# Altium PCB Flow_Pump显示板_V2.0.PcbDoc
Units mil, origin at the board's own origin, x right, y up, seen from the top; angles counter-clockwise.
Board outline 3740.47 x 3740.47 mil, 2 copper layers (Top Layer, Bottom Layer); 36 components, 33 nets, 119 pads, 1248 vias.
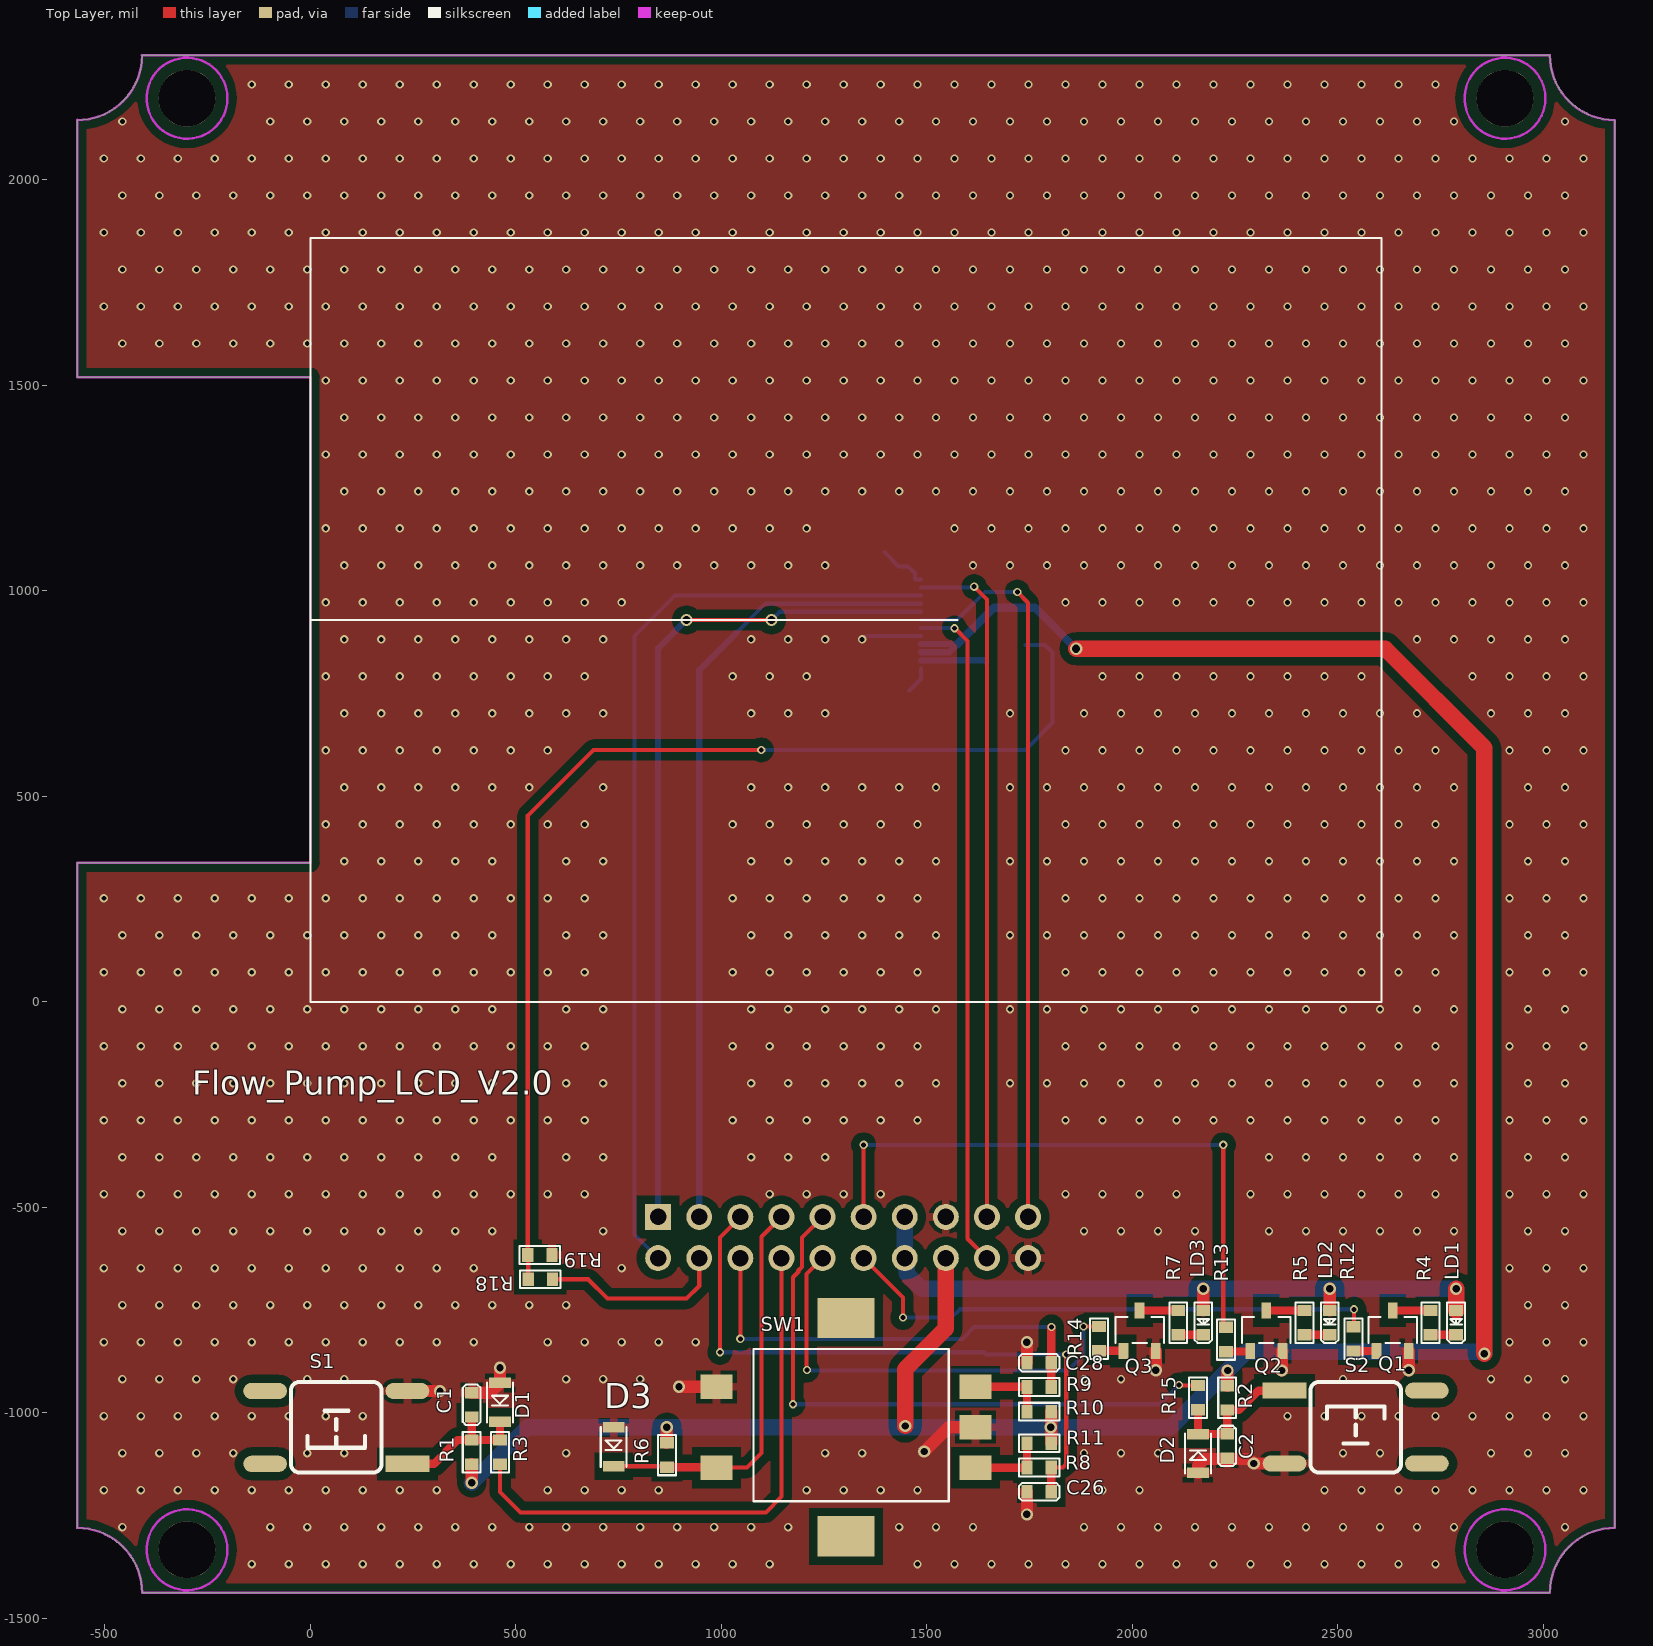
[diagram p0: Top Layer view]
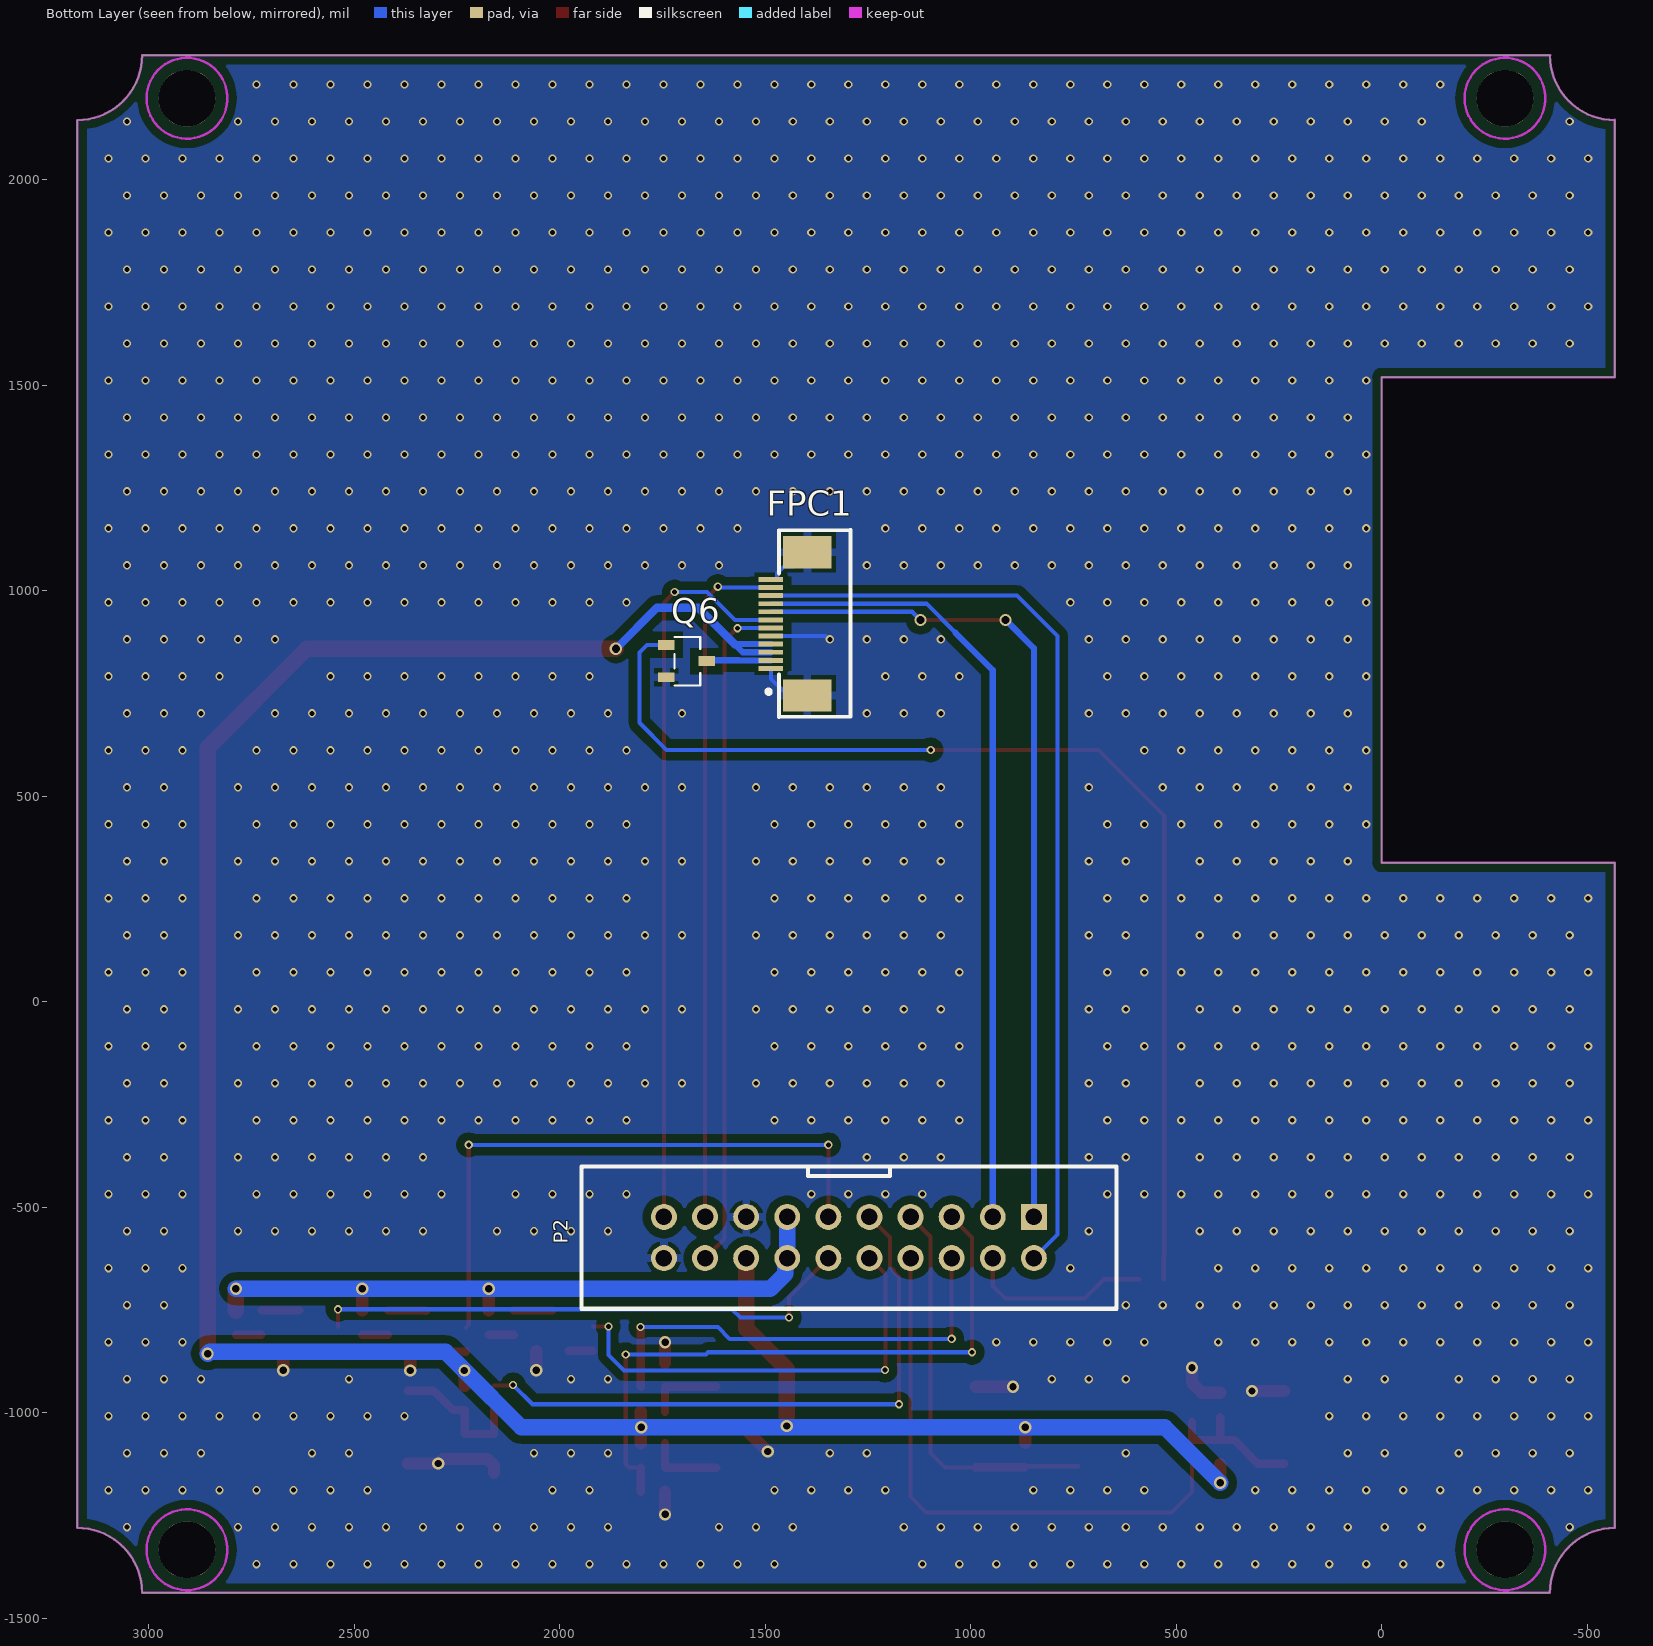
[diagram p1: Bottom Layer view, seen from below]

## Layer stack, top to bottom
Top Solder: solder mask 0.4, Solder Resist, Dk 3.5
Top Layer: signal copper 1.4
Dielectric 1: dielectric 12.6, FR-4, Dk 4.8
Bottom Layer: signal copper 1.4
Bottom Solder: solder mask 0.4, Solder Resist, Dk 3.5

## Board outline
-566.93,-1279.92 -566.93,338.58 0,338.58 0,1519.69 -567.09,1519.69 -567.09,1521.86 -567.09,2145.12 ccw(c-567.09,2302.6) -409.61,2302.6 -409.93,2302.76 3015.75,2302.76 3015.59,2302.91 ccw(c3173.07,2302.91) 3173.07,2145.43 3173.07,-1279.76 3173.39,-1279.76 ccw(c3173.39,-1437.24) 3015.91,-1437.24 3015.91,-1437.4 -409.29,-1437.4 -409.29,-1437.56 ccw(c-566.77,-1437.56)

## Design rules (kind name [scope] priority, off if disabled: settings)
Clearance Clearance_1 [InPolygon] p1: gap=20 ignorepadtopadclearanceinfootprint=FALSE
Clearance [All] p2: gap=5 ignorepadtopadclearanceinfootprint=FALSE
HoleSize [All] p1: absolutevalues=TRUE maxlimit=200 minlimit=1 maxpercent=80.000 minpercent=20.000
PolygonConnect PolygonConnect_1 [IsVia] p1: connectstyle=Direct reliefconductorwidth=10 reliefentries=4 polygonreliefangle="90 Angle" airgapwidth=10
PolygonConnect [All] p2: connectstyle=Relief reliefconductorwidth=20 reliefentries=4 polygonreliefangle="90 Angle" airgapwidth=10
RoutingVias [All] p1: holewidth=28 width=50 viastyle="Through Hole" minholewidth=28 minwidth=50 maxholewidth=28 maxwidth=50
SolderMaskExpansion [All] p1: expansion=4 istentingtop=FALSE
Width [All] p1: maxlimit=150 minlimit=10 preferedwidth=10
29 further rules are at their usual default settings.

## Components (designator, comment, footprint, x,y, rotation, side; value= is the part's Value field where it differs from the comment)
C1 "1uF/25V" 0603C 392.44,-951.03 r270 top value=0.1u/50V
C2 "1uF/25V" 0603C 2230.44,-1110.09 r90 top value=0.1u/50V
C26 "10nF" 0603C 1743.39,-1192.03 r0 top
C28 "10nF" 0603C 1802.44,-878.03 r180 top
D1 "CESDB5V0D3" SOD323 461.44,-927.03 r270 top
D2 "CESDB5V0D3" SOD323 2159.44,-1146.03 r90 top
D3 "CESDB5V0D3" SOD323 738,-1035.51 r270 top
FPC1 "AFC07-S12FCA-00" FPC-SMD_12P-P0.50_AFC07-S12FCA-00 1441.49,919.6 r90 bottom locked
LD1 "LED_Green_19-217" 0603LED 2787.44,-751.03 r270 top value=19-217/G7C-AN1P2/3T
LD2 "LED_Green_19-217" 0603LED 2479.94,-751.03 r270 top value=19-217/G7C-AN1P2/3T
LD3 "LED_Green_19-217" 0603LED 2172.44,-751.03 r270 top value=19-217/G7C-AN1P2/3T
P2 "BH254V-20P" DC-2.54-L-Z-20P 1296.07,-573.4 r0 bottom
Q1 "MMBT3904" SOT23-3 2593.7,-849.46 r270 top
Q2 "MMBT3904" SOT23-3 2286.44,-849.46 r270 top
Q3 "MMBT3904" SOT23-3 1978.07,-849.46 r270 top
Q6 "MMBT3904" SOT23-3 1740.43,868.37 r0 bottom
R1 "10K" 0603R 392.44,-1125.09 r90 top
R2 "10K" 0603R 2230.44,-934.03 r270 top
R3 "100" 0603R 461.44,-1125.09 r90 top
R4 "1K" 0603R 2725.44,-810.09 r90 top
R5 "1K" 0603R 2418.44,-810.09 r90 top
R6 "4.7K" 0603R 867.44,-1073.03 r270 top
R7 "1K" 0603R 2111.44,-810.09 r90 top
R8 "10K" 0603R 1802.44,-1133.03 r180 top
R9 "10K" 0603R 1802.44,-937.03 r180 top
R10 "10K" 0603R 1743.39,-997.03 r0 top
R11 "10K" 0603R 1743.39,-1074.03 r0 top
R12 "1K" 0603R 2537.87,-790.4 r270 top
R13 "1K" 0603R 2227.44,-792.03 r270 top
R14 "1K" 0603R 1918.44,-790.03 r270 top
R15 "100" 0603R 2159.44,-933.49 r270 top
R18 "1K" 0603R 589.06,-675 r180 top
R19 "10K" 0603R 528.94,-616 r0 top
S1 "SW-PB" "TSW SMD-6*6*8" 62.99,-1034.96 r180 top locked
S2 "SW-PB" "TSW SMD-6*6*8" 2543.31,-1034.96 r0 top locked
SW1 "RE1103" EX1103S-D2-10 1303.15,-1034.96 r90 top locked

## Footprints (in the part's own frame and the unit in brackets; to place one, negate y for a bottom-side part, rotate by r counter-clockwise, add the part's x,y. Pads: shape width x height; smd on the part's side, far side on the other; paste and mask are expansions set on the pad)
0603C [mm]
  rect 0.7x0.85 smd: 1(0,0) 2(1.5,0)
  silkscreen extent -0.5,-0.55 2,0.55
0603LED [mm]
  rect 0.7x0.85 smd: 1(0,0) 2(1.5,0)
  silkscreen extent -0.5,-0.55 2,0.55
0603R [mm]
  rect 0.7x0.85 smd: 1(0,0) 2(1.5,0)
  silkscreen extent -0.5,-0.55 2,0.55
DC-2.54-L-Z-20P [mm] "立式直插简牛插座，间距2.54"
  rect 1.6x1.6 hole 1.02: 1(-11.43,-1.27)
  round 1.6 hole 1.02: 2(-11.43,1.27) 3(-8.89,-1.27) 4(-8.89,1.27) 5(-6.35,-1.27) 6(-6.35,1.27) 7(-3.81,-1.27) 8(-3.81,1.27) 9(-1.27,-1.27) 10(-1.27,1.27) 11(1.27,-1.27) 12(1.27,1.27) 13(3.81,-1.27) 14(3.81,1.27) 15(6.35,-1.27) 16(6.35,1.27) 17(8.89,-1.27) 18(8.89,1.27) 19(11.43,-1.27) 20(11.43,1.27)
  silkscreen extent -16.53,-4.4 16.53,4.4, body extent -16.53,-4.4 16.52,4.7, height 8.8
EX1103S-D2-10 [mm]
  rect 1.5x2 smd: A(-2.5,-8) B(2.5,-8) C(0,-8) D(-2.5,8) E(2.5,8)
  rect 2.5x3.5 smd: A3(6.75,0) A4(-6.75,0)
  silkscreen extent -4.57,-6.35 4.83,5.71
FPC-SMD_12P-P0.50_AFC07-S12FCA-00 [mm]
  rect 0.3x1.5 smd paste+0.051: 1(-2.754,1.13) 2(-2.254,1.13) 3(-1.755,1.13) 4(-1.254,1.13) 5(-0.755,1.13) 6(-0.254,1.13) 7(0.245,1.13) 8(0.746,1.13) 9(1.245,1.13) 10(1.746,1.13) 11(2.245,1.13) 12(2.746,1.13)
  rect 2x3 smd paste+0.051: 13(4.43,-1.13) 14(-4.43,-1.124)
  silkscreen extent -5.76,-3.8 5.8,1.4
SOD323 [mm]
  rect 0.65x1.35 smd: 1(0,0) 2(2.4,0)
  silkscreen extent -0.03,-0.8 2.44,0.8
SOT23-3 [mm]
  rect 1x0.6 smd: 1(0,0) 2(0,2) 3(-2.5,1)
  silkscreen extent -2.1,-0.5 -0.5,2.5
"TSW SMD-6*6*8" [mm] "6*6*8mm"
  rect 2.7x1 smd: 1(-4.4,2.261)
  oval 2.7x1 smd: 2(-4.4,-2.239) 3(4.4,-2.239) 4(4.4,2.261)
  silkscreen extent -2.79,-2.79 2.79,2.79, body extent -4.5,-3 4.5,3, height 7.95

## Part data
C1 C2: library part CAP
C26 C28: library part CAP, "Capacitor"
D1 D2 D3: library part "DIODE S"
P2: library part "Header 10X2", "Header, 10-Pin, Dual row", LatestRevisionDate=17-Jul-2002, LatestRevisionNote="Re-released for DXP Platform.", Publisher="Altium Limited"
Q1 Q2 Q3 Q6: library part NPN_MMBT3904
R1 R2 R3 R4 R5 R7 R12 R13 R14 R15 R18 R19: library part RES0603, ID=233, 制造商=三星/YAGEO, 参数值=1.00E+04, 器件等级=——, 工作温度="–55°C to 155°C", 序号=109, 物料主编码(PN)=150000040, 物料名称=贴片电阻, 物料描述=RES,贴片电阻,0603,10k,±1%,1/10W,1.6X0.8X0.45mm,RC1608F103CS/RC0603FR-0710KL, 物料类型=表贴电阻, 精度=±1%, 规格型号(完整型号)=RC1608F103CS/RC0603FR-0710KL
R6 R8 R9 R10 R11: library part RES2
S1 S2: "Switch", LatestRevisionDate=17-Jul-2002, LatestRevisionNote="Re-released for DXP Platform.", PackageReference=SPST-2, Published=24-Mar-1999, Publisher="Altium Limited"
FPC1: Symbol=AFC07-S12FCA-00
LD1 LD2 LD3: ID=6, 制造商=Everlight, 器件等级=——, 工作温度="–40°C to 85°C", 序号=33, 物料主编码(PN)=100000032, 物料名称=绿色LED, 物料描述=Other,LED,绿色,0603,1.6X0.8X0.4mm,19-217/G7C-AN1P2/3T, 物料类型=特殊二极管, 规格型号(完整型号)=19-217/G7C-AN1P2/3T

## Free pads (board coordinates)
  round 137.8 hole 137.8 unplated: 0(-300.14,-1332.99) 0(-300.14,2198.35) 0(2906.44,-1332.99) 0(2906.44,2198.35)

## Via types
v1: diameter 20, hole 12, Top Layer to Bottom Layer, tented both sides, 1226 vias
v2: diameter 30, hole 18, Top Layer to Bottom Layer, tented both sides, 19 vias
v3: diameter 30, hole 20, Top Layer to Bottom Layer, tented both sides, 3 vias

## Nets (pads, with @x,y where several pads share a name; then routed paths per layer and width w, separated by ;. In a path a pad name is that pad's centre, name@x,y a point inside that pad or via, vN(x,y) a via of type N, cw(c..) or ccw(c..) an arc to the next point about the centre after c; other vN are vias at no path point)
3.3V_ISO: FPC1.3 FPC1.4 P2.16 R1.1 R2.1 R6.1 R10.2 R11.2 | length 6363.8
  Top Layer w30: v2(392.44,-1170.03) R1.1 ; R6.1 v2(867.44,-1035.03) ; R11.2 R10.2 ; R2.1 2230.44,-898.03 v2(2231.44,-897.03)
  Top Layer w40: v2(1447,-1032) 1447,-894 1546.07,-794.93 P2.16 ; v3(1863,859) 2615,859 2856.44,617.56 v2(2856.44,-856.03)
  Bottom Layer w15: FPC1.3 1554.52,850.52 1574.21,870.21 FPC1.4
  Bottom Layer w20: 1574.21,870.21 1663,959 1763,959 v3(1863,859)
  Bottom Layer w40: v2(392.44,-1170.03) 527.44,-1035.03 v2(867.44,-1035.03) v2(1801.44,-1035.03) 2093.44,-1035.03 v2(2231.44,-897.03) 2277.44,-851.03 2851.44,-851.03 v2(2856.44,-856.03)
BL: P2.4 R18.1 | length 456.9
  Top Layer w10: R18.1 676,-675 723,-722 915,-722 946.07,-690.93 P2.4
CS: FPC1.8 P2.1 | length 2060.2
  Top Layer w10: v3(915,929) v3(1122,929)
  Bottom Layer w10: v3(1122,929) 1141.95,948.95 FPC1.8
  Bottom Layer w15: P2.1 846.07,860.07 v3(915,929)
DC: FPC1.7 P2.19 | length 1793.3
  Top Layer w10: v1(1720,997) 1746.07,970.93 P2.19
  Bottom Layer w10: FPC1.7 1573.26,929.26 1641,997 v1(1720,997)
FAULT: P2.12 R12.1 | length 1333
  Top Layer w10: P2.12 1441.74,-719.07 v1(1441.74,-768.26) ; R12.1 2539,-789.27 v1(2539,-748)
  Bottom Layer w10: v1(1441.74,-768.26) 1559.74,-768.26 1580,-748 v1(2539,-748)
GND: C1.1 C2.1 C26.1 C28.2 D1.1 D2.1 D3.1 FPC1.1 FPC1.5 FPC1.12 FPC1.13 FPC1.14 P2.15 P2.20 Q1.2 Q2.2 Q3.2 Q6.2 R19.2 S1.2 S2.2 SW1.C SW1.E | length 1258.9
  Top Layer w30: S1.2 v2(315.44,-946.79) ; C1.1 437.44,-951.03 D1.1 v2(461.44,-890.03) ; v2(896.94,-936.54) SW1.E ; v2(1493.44,-1094.03) 1552.51,-1034.96 SW1.C ; v2(1743.39,-1247.09) C26.1 ; C28.2 v2(1743.39,-827.98) ; v2(2056.81,-896.66) Q3.2 ; D2.1 2159.44,-1128.03 2175.44,-1112.03 2284.39,-1112.03 v2(2295.48,-1123.13) S2.2 ; v2(2363.44,-897.03) 2363.44,-851.2 Q2.2@2364.18,-850.46 ; v2(2672.44,-896.03) Q1.2
  Bottom Layer w10: v1(1342.44,881.97) 1345.15,881.97 1353.07,889.89 FPC1.5 ; FPC1.13 1431.37,1059.63 1454.04,1059.63 1470.93,1042.74 1470.93,1028.6 1471.84,1027.69 FPC1.12 ; 1457,757 1485.98,785.98 FPC1.1
  other v1: -142.56,-1368.03 -52.56,-1368.03 37.44,-1368.03 127.44,-1368.03 217.44,-1368.03 307.44,-1368.03 397.44,-1368.03 487.44,-1368.03 577.44,-1368.03 667.44,-1368.03 757.44,-1368.03 847.44,-1368.03 937.44,-1368.03 1027.44,-1368.03 1117.44,-1368.03 1477.44,-1368.03 1567.44,-1368.03 1657.44,-1368.03 1747.44,-1368.03 1837.44,-1368.03 1927.44,-1368.03 2017.44,-1368.03 2107.44,-1368.03 2197.44,-1368.03 2287.44,-1368.03 2377.44,-1368.03 2467.44,-1368.03 2557.44,-1368.03 2647.44,-1368.03 2737.44,-1368.03 -457.56,-1278.03 -97.56,-1278.03 -7.56,-1278.03 82.44,-1278.03 172.44,-1278.03 262.44,-1278.03 352.44,-1278.03 442.44,-1278.03 532.44,-1278.03 622.44,-1278.03 712.44,-1278.03 802.44,-1278.03 892.44,-1278.03 982.44,-1278.03 1072.44,-1278.03 1162.44,-1278.03 1432.44,-1278.03 1522.44,-1278.03 1612.44,-1278.03 1882.44,-1278.03 1972.44,-1278.03 2062.44,-1278.03 2152.44,-1278.03 2242.44,-1278.03 2332.44,-1278.03 2422.44,-1278.03 2512.44,-1278.03 2602.44,-1278.03 2692.44,-1278.03 2782.44,-1278.03 3052.44,-1278.03 -502.56,-1188.03 -412.56,-1188.03 -322.56,-1188.03 -232.56,-1188.03 -142.56,-1188.03 -52.56,-1188.03 37.44,-1188.03 127.44,-1188.03 217.44,-1188.03 307.44,-1188.03 577.44,-1188.03 667.44,-1188.03 757.44,-1188.03 847.44,-1188.03 1207.44,-1188.03 1297.44,-1188.03 1387.44,-1188.03 1477.44,-1188.03 1927.44,-1188.03 2017.44,-1188.03 2467.44,-1188.03 2557.44,-1188.03 2647.44,-1188.03 2737.44,-1188.03 2827.44,-1188.03 2917.44,-1188.03 3007.44,-1188.03 3097.44,-1188.03 -457.56,-1098.03 -367.56,-1098.03 -277.56,-1098.03 -187.56,-1098.03 -7.56,-1098.03 82.44,-1098.03 622.44,-1098.03 1252.44,-1098.03 1342.44,-1098.03 1882.44,-1098.03 1972.44,-1098.03 2062.44,-1098.03 2512.44,-1098.03 2602.44,-1098.03 2872.44,-1098.03 2962.44,-1098.03 3052.44,-1098.03 -502.56,-1008.03 -412.56,-1008.03 -322.56,-1008.03 -232.56,-1008.03 -142.56,-1008.03 -52.56,-1008.03 37.44,-1008.03 127.44,-1008.03 2377.44,-1008.03 2467.44,-1008.03 2557.44,-1008.03 2647.44,-1008.03 2737.44,-1008.03 2827.44,-1008.03 2917.44,-1008.03 3007.44,-1008.03 3097.44,-1008.03 -457.56,-918.03 -367.56,-918.03 -277.56,-918.03 -187.56,-918.03 -7.56,-918.03 82.44,-918.03 622.44,-918.03 712.44,-918.03 802.44,-918.03 1882.44,-918.03 1972.44,-918.03 2512.44,-918.03 2872.44,-918.03 2962.44,-918.03 3052.44,-918.03 -502.56,-828.03 -412.56,-828.03 -322.56,-828.03 -232.56,-828.03 -142.56,-828.03 -52.56,-828.03 37.44,-828.03 127.44,-828.03 217.44,-828.03 307.44,-828.03 397.44,-828.03 577.44,-828.03 667.44,-828.03 757.44,-828.03 847.44,-828.03 937.44,-828.03 2917.44,-828.03 3007.44,-828.03 3097.44,-828.03 -457.56,-738.03 -367.56,-738.03 -277.56,-738.03 -187.56,-738.03 -97.56,-738.03 -7.56,-738.03 82.44,-738.03 172.44,-738.03 262.44,-738.03 352.44,-738.03 442.44,-738.03 532.44,-738.03 622.44,-738.03 2962.44,-738.03 3052.44,-738.03 -502.56,-648.03 -412.56,-648.03 -322.56,-648.03 -232.56,-648.03 -142.56,-648.03 -52.56,-648.03 37.44,-648.03 127.44,-648.03 217.44,-648.03 307.44,-648.03 397.44,-648.03 757.44,-648.03 2917.44,-648.03 3007.44,-648.03 3097.44,-648.03 -457.56,-558.03 -367.56,-558.03 -277.56,-558.03 -187.56,-558.03 -97.56,-558.03 -7.56,-558.03 82.44,-558.03 172.44,-558.03 262.44,-558.03 352.44,-558.03 442.44,-558.03 712.44,-558.03 1882.44,-558.03 1972.44,-558.03 2062.44,-558.03 2152.44,-558.03 2332.44,-558.03 2422.44,-558.03 2512.44,-558.03 2602.44,-558.03 2692.44,-558.03 2782.44,-558.03 2962.44,-558.03 3052.44,-558.03 -502.56,-468.03 -412.56,-468.03 -322.56,-468.03 -232.56,-468.03 -142.56,-468.03 -52.56,-468.03 37.44,-468.03 127.44,-468.03 217.44,-468.03 307.44,-468.03 397.44,-468.03 487.44,-468.03 577.44,-468.03 667.44,-468.03 1117.44,-468.03 1207.44,-468.03 1297.44,-468.03 1387.44,-468.03 1837.44,-468.03 1927.44,-468.03 2017.44,-468.03 2107.44,-468.03 2287.44,-468.03 2377.44,-468.03 2467.44,-468.03 2557.44,-468.03 2647.44,-468.03 2737.44,-468.03 2917.44,-468.03 3007.44,-468.03 3097.44,-468.03 -457.56,-378.03 -367.56,-378.03 -277.56,-378.03 -187.56,-378.03 -97.56,-378.03 -7.56,-378.03 82.44,-378.03 172.44,-378.03 262.44,-378.03 352.44,-378.03 442.44,-378.03 622.44,-378.03 712.44,-378.03 1072.44,-378.03 1162.44,-378.03 1252.44,-378.03 2332.44,-378.03 2422.44,-378.03 2512.44,-378.03 2602.44,-378.03 2692.44,-378.03 2782.44,-378.03 2962.44,-378.03 3052.44,-378.03 -502.56,-288.03 -412.56,-288.03 -322.56,-288.03 -232.56,-288.03 -142.56,-288.03 -52.56,-288.03 37.44,-288.03 127.44,-288.03 217.44,-288.03 307.44,-288.03 397.44,-288.03 487.44,-288.03 577.44,-288.03 667.44,-288.03 1027.44,-288.03 1117.44,-288.03 1207.44,-288.03 1297.44,-288.03 1387.44,-288.03 1477.44,-288.03 1837.44,-288.03 1927.44,-288.03 2017.44,-288.03 2107.44,-288.03 2197.44,-288.03 2287.44,-288.03 2377.44,-288.03 2467.44,-288.03 2557.44,-288.03 2647.44,-288.03 2737.44,-288.03 2917.44,-288.03 3007.44,-288.03 3097.44,-288.03 -457.56,-198.03 -367.56,-198.03 -277.56,-198.03 -187.56,-198.03 -97.56,-198.03 -7.56,-198.03 82.44,-198.03 172.44,-198.03 262.44,-198.03 352.44,-198.03 442.44,-198.03 622.44,-198.03 712.44,-198.03 1072.44,-198.03 1162.44,-198.03 1252.44,-198.03 1342.44,-198.03 1432.44,-198.03 1522.44,-198.03 1702.44,-198.03 1792.44,-198.03 1882.44,-198.03 1972.44,-198.03 2062.44,-198.03 2152.44,-198.03 2242.44,-198.03 2332.44,-198.03 2422.44,-198.03 2512.44,-198.03 2602.44,-198.03 2692.44,-198.03 2782.44,-198.03 2962.44,-198.03 3052.44,-198.03 -502.56,-108.03 -412.56,-108.03 -322.56,-108.03 -232.56,-108.03 -142.56,-108.03 -52.56,-108.03 37.44,-108.03 127.44,-108.03 217.44,-108.03 307.44,-108.03 397.44,-108.03 487.44,-108.03 577.44,-108.03 667.44,-108.03 1027.44,-108.03 1117.44,-108.03 1207.44,-108.03 1297.44,-108.03 1387.44,-108.03 1477.44,-108.03 1837.44,-108.03 1927.44,-108.03 2017.44,-108.03 2107.44,-108.03 2197.44,-108.03 2287.44,-108.03 2377.44,-108.03 2467.44,-108.03 2557.44,-108.03 2647.44,-108.03 2737.44,-108.03 2917.44,-108.03 3007.44,-108.03 3097.44,-108.03 -457.56,-18.03 -367.56,-18.03 -277.56,-18.03 -187.56,-18.03 -97.56,-18.03 -7.56,-18.03 82.44,-18.03 172.44,-18.03 262.44,-18.03 352.44,-18.03 442.44,-18.03 622.44,-18.03 712.44,-18.03 1072.44,-18.03 1162.44,-18.03 1252.44,-18.03 1342.44,-18.03 1432.44,-18.03 1522.44,-18.03 1702.44,-18.03 1792.44,-18.03 1882.44,-18.03 1972.44,-18.03 2062.44,-18.03 2152.44,-18.03 2242.44,-18.03 2332.44,-18.03 2422.44,-18.03 2512.44,-18.03 2602.44,-18.03 2692.44,-18.03 2782.44,-18.03 2962.44,-18.03 3052.44,-18.03 -502.56,71.97 -412.56,71.97 -322.56,71.97 -232.56,71.97 -142.56,71.97 -52.56,71.97 37.44,71.97 127.44,71.97 217.44,71.97 307.44,71.97 397.44,71.97 487.44,71.97 577.44,71.97 667.44,71.97 1027.44,71.97 1117.44,71.97 1207.44,71.97 1297.44,71.97 1387.44,71.97 1477.44,71.97 1837.44,71.97 1927.44,71.97 2017.44,71.97 2107.44,71.97 2197.44,71.97 2287.44,71.97 2377.44,71.97 2467.44,71.97 2557.44,71.97 2647.44,71.97 2737.44,71.97 2917.44,71.97 3007.44,71.97 3097.44,71.97 -457.56,161.97 -367.56,161.97 -277.56,161.97 -187.56,161.97 -97.56,161.97 -7.56,161.97 82.44,161.97 172.44,161.97 262.44,161.97 352.44,161.97 442.44,161.97 622.44,161.97 712.44,161.97 1072.44,161.97 1162.44,161.97 1252.44,161.97 1342.44,161.97 1432.44,161.97 1522.44,161.97 1702.44,161.97 1792.44,161.97 1882.44,161.97 1972.44,161.97 2062.44,161.97 2152.44,161.97 2242.44,161.97 2332.44,161.97 2422.44,161.97 2512.44,161.97 2602.44,161.97 2692.44,161.97 2782.44,161.97 2962.44,161.97 3052.44,161.97 -502.56,251.97 -412.56,251.97 -322.56,251.97 -232.56,251.97 -142.56,251.97 -52.56,251.97 37.44,251.97 127.44,251.97 217.44,251.97 307.44,251.97 397.44,251.97 487.44,251.97 577.44,251.97 667.44,251.97 1027.44,251.97 1117.44,251.97 1207.44,251.97 1297.44,251.97 1387.44,251.97 1477.44,251.97 1837.44,251.97 1927.44,251.97 2017.44,251.97 2107.44,251.97 2197.44,251.97 2287.44,251.97 2377.44,251.97 2467.44,251.97 2557.44,251.97 2647.44,251.97 2737.44,251.97 2917.44,251.97 3007.44,251.97 3097.44,251.97 82.44,341.97 172.44,341.97 262.44,341.97 352.44,341.97 442.44,341.97 622.44,341.97 712.44,341.97 1072.44,341.97 1162.44,341.97 1252.44,341.97 1342.44,341.97 1432.44,341.97 1522.44,341.97 1702.44,341.97 1792.44,341.97 1882.44,341.97 1972.44,341.97 2062.44,341.97 2152.44,341.97 2242.44,341.97 2332.44,341.97 2422.44,341.97 2512.44,341.97 2602.44,341.97 2692.44,341.97 2782.44,341.97 2962.44,341.97 3052.44,341.97 37.44,431.97 127.44,431.97 217.44,431.97 307.44,431.97 397.44,431.97 487.44,431.97 577.44,431.97 667.44,431.97 1027.44,431.97 1117.44,431.97 1207.44,431.97 1297.44,431.97 1387.44,431.97 1477.44,431.97 1837.44,431.97 1927.44,431.97 2017.44,431.97 2107.44,431.97 2197.44,431.97 2287.44,431.97 2377.44,431.97 2467.44,431.97 2557.44,431.97 2647.44,431.97 2737.44,431.97 2917.44,431.97 3007.44,431.97 3097.44,431.97 82.44,521.97 172.44,521.97 262.44,521.97 352.44,521.97 442.44,521.97 532.44,521.97 712.44,521.97 1072.44,521.97 1162.44,521.97 1252.44,521.97 1342.44,521.97 1432.44,521.97 1522.44,521.97 1702.44,521.97 1792.44,521.97 1882.44,521.97 1972.44,521.97 2062.44,521.97 2152.44,521.97 2242.44,521.97 2332.44,521.97 2422.44,521.97 2512.44,521.97 2602.44,521.97 2692.44,521.97 2782.44,521.97 2962.44,521.97 3052.44,521.97 37.44,611.97 127.44,611.97 217.44,611.97 307.44,611.97 397.44,611.97 487.44,611.97 577.44,611.97 1837.44,611.97 1927.44,611.97 2017.44,611.97 2107.44,611.97 2197.44,611.97 2287.44,611.97 2377.44,611.97 2467.44,611.97 2557.44,611.97 2647.44,611.97 2737.44,611.97 2917.44,611.97 3007.44,611.97 3097.44,611.97 82.44,701.97 172.44,701.97 262.44,701.97 352.44,701.97 442.44,701.97 532.44,701.97 622.44,701.97 712.44,701.97 1072.44,701.97 1162.44,701.97 1252.44,701.97 1702.44,701.97 1882.44,701.97 1972.44,701.97 2062.44,701.97 2152.44,701.97 2242.44,701.97 2332.44,701.97 2422.44,701.97 2512.44,701.97 2602.44,701.97 2692.44,701.97 2872.44,701.97 2962.44,701.97 3052.44,701.97 37.44,791.97 127.44,791.97 217.44,791.97 307.44,791.97 397.44,791.97 487.44,791.97 577.44,791.97 667.44,791.97 1027.44,791.97 1117.44,791.97 1207.44,791.97 1927.44,791.97 2017.44,791.97 2107.44,791.97 2197.44,791.97 2287.44,791.97 2377.44,791.97 2467.44,791.97 2557.44,791.97 2827.44,791.97 2917.44,791.97 3007.44,791.97 3097.44,791.97 82.44,881.97 172.44,881.97 262.44,881.97 352.44,881.97 442.44,881.97 532.44,881.97 622.44,881.97 712.44,881.97 1072.44,881.97 1162.44,881.97 1252.44,881.97 2692.44,881.97 2782.44,881.97 2872.44,881.97 2962.44,881.97 3052.44,881.97 37.44,971.97 127.44,971.97 217.44,971.97 307.44,971.97 397.44,971.97 487.44,971.97 577.44,971.97 667.44,971.97 757.44,971.97 1837.44,971.97 1927.44,971.97 2017.44,971.97 2107.44,971.97 2197.44,971.97 2287.44,971.97 2377.44,971.97 2467.44,971.97 2557.44,971.97 2647.44,971.97 2737.44,971.97 2827.44,971.97 2917.44,971.97 3007.44,971.97 3097.44,971.97 82.44,1061.97 172.44,1061.97 262.44,1061.97 352.44,1061.97 442.44,1061.97 532.44,1061.97 622.44,1061.97 712.44,1061.97 802.44,1061.97 892.44,1061.97 982.44,1061.97 1072.44,1061.97 1162.44,1061.97 1252.44,1061.97 1612.44,1061.97 1702.44,1061.97 1792.44,1061.97 1882.44,1061.97 1972.44,1061.97 2062.44,1061.97 2152.44,1061.97 2242.44,1061.97 2332.44,1061.97 2422.44,1061.97 2512.44,1061.97 2602.44,1061.97 2692.44,1061.97 2782.44,1061.97 2872.44,1061.97 2962.44,1061.97 3052.44,1061.97 37.44,1151.97 127.44,1151.97 217.44,1151.97 307.44,1151.97 397.44,1151.97 487.44,1151.97 577.44,1151.97 667.44,1151.97 757.44,1151.97 847.44,1151.97 937.44,1151.97 1027.44,1151.97 1117.44,1151.97 1207.44,1151.97 1567.44,1151.97 1657.44,1151.97 1747.44,1151.97 1837.44,1151.97 1927.44,1151.97 2017.44,1151.97 2107.44,1151.97 2197.44,1151.97 2287.44,1151.97 2377.44,1151.97 2467.44,1151.97 2557.44,1151.97 2647.44,1151.97 2737.44,1151.97 2827.44,1151.97 2917.44,1151.97 3007.44,1151.97 3097.44,1151.97 82.44,1241.97 172.44,1241.97 262.44,1241.97 352.44,1241.97 442.44,1241.97 532.44,1241.97 622.44,1241.97 712.44,1241.97 802.44,1241.97 892.44,1241.97 982.44,1241.97 1072.44,1241.97 1162.44,1241.97 1252.44,1241.97 1342.44,1241.97 1432.44,1241.97 1522.44,1241.97 1612.44,1241.97 1702.44,1241.97 1792.44,1241.97 1882.44,1241.97 1972.44,1241.97 2062.44,1241.97 2152.44,1241.97 2242.44,1241.97 2332.44,1241.97 2422.44,1241.97 2512.44,1241.97 2602.44,1241.97 2692.44,1241.97 2782.44,1241.97 2872.44,1241.97 2962.44,1241.97 3052.44,1241.97 37.44,1331.97 127.44,1331.97 217.44,1331.97 307.44,1331.97 397.44,1331.97 487.44,1331.97 577.44,1331.97 667.44,1331.97 757.44,1331.97 847.44,1331.97 937.44,1331.97 1027.44,1331.97 1117.44,1331.97 1207.44,1331.97 1297.44,1331.97 1387.44,1331.97 1477.44,1331.97 1567.44,1331.97 1657.44,1331.97 1747.44,1331.97 1837.44,1331.97 1927.44,1331.97 2017.44,1331.97 2107.44,1331.97 2197.44,1331.97 2287.44,1331.97 2377.44,1331.97 2467.44,1331.97 2557.44,1331.97 2647.44,1331.97 2737.44,1331.97 2827.44,1331.97 2917.44,1331.97 3007.44,1331.97 3097.44,1331.97 82.44,1421.97 172.44,1421.97 262.44,1421.97 352.44,1421.97 442.44,1421.97 532.44,1421.97 622.44,1421.97 712.44,1421.97 802.44,1421.97 892.44,1421.97 982.44,1421.97 1072.44,1421.97 1162.44,1421.97 1252.44,1421.97 1342.44,1421.97 1432.44,1421.97 1522.44,1421.97 1612.44,1421.97 1702.44,1421.97 1792.44,1421.97 1882.44,1421.97 1972.44,1421.97 2062.44,1421.97 2152.44,1421.97 2242.44,1421.97 2332.44,1421.97 2422.44,1421.97 2512.44,1421.97 2602.44,1421.97 2692.44,1421.97 2782.44,1421.97 2872.44,1421.97 2962.44,1421.97 3052.44,1421.97 37.44,1511.97 127.44,1511.97 217.44,1511.97 307.44,1511.97 397.44,1511.97 487.44,1511.97 577.44,1511.97 667.44,1511.97 757.44,1511.97 847.44,1511.97 937.44,1511.97 1027.44,1511.97 1117.44,1511.97 1207.44,1511.97 1297.44,1511.97 1387.44,1511.97 1477.44,1511.97 1567.44,1511.97 1657.44,1511.97 1747.44,1511.97 1837.44,1511.97 1927.44,1511.97 2017.44,1511.97 2107.44,1511.97 2197.44,1511.97 2287.44,1511.97 2377.44,1511.97 2467.44,1511.97 2557.44,1511.97 2647.44,1511.97 2737.44,1511.97 2827.44,1511.97 2917.44,1511.97 3007.44,1511.97 3097.44,1511.97 -457.56,1601.97 -367.56,1601.97 -277.56,1601.97 -187.56,1601.97 -97.56,1601.97 -7.56,1601.97 82.44,1601.97 172.44,1601.97 262.44,1601.97 352.44,1601.97 442.44,1601.97 532.44,1601.97 622.44,1601.97 712.44,1601.97 802.44,1601.97 892.44,1601.97 982.44,1601.97 1072.44,1601.97 1162.44,1601.97 1252.44,1601.97 1342.44,1601.97 1432.44,1601.97 1522.44,1601.97 1612.44,1601.97 1702.44,1601.97 1792.44,1601.97 1882.44,1601.97 1972.44,1601.97 2062.44,1601.97 2152.44,1601.97 2242.44,1601.97 2332.44,1601.97 2422.44,1601.97 2512.44,1601.97 2602.44,1601.97 2692.44,1601.97 2782.44,1601.97 2872.44,1601.97 2962.44,1601.97 3052.44,1601.97 -502.56,1691.97 -412.56,1691.97 -322.56,1691.97 -232.56,1691.97 -142.56,1691.97 -52.56,1691.97 37.44,1691.97 127.44,1691.97 217.44,1691.97 307.44,1691.97 397.44,1691.97 487.44,1691.97 577.44,1691.97 667.44,1691.97 757.44,1691.97 847.44,1691.97 937.44,1691.97 1027.44,1691.97 1117.44,1691.97 1207.44,1691.97 1297.44,1691.97 1387.44,1691.97 1477.44,1691.97 1567.44,1691.97 1657.44,1691.97 1747.44,1691.97 1837.44,1691.97 1927.44,1691.97 2017.44,1691.97 2107.44,1691.97 2197.44,1691.97 2287.44,1691.97 2377.44,1691.97 2467.44,1691.97 2557.44,1691.97 2647.44,1691.97 2737.44,1691.97 2827.44,1691.97 2917.44,1691.97 3007.44,1691.97 3097.44,1691.97 -457.56,1781.97 -367.56,1781.97 -277.56,1781.97 -187.56,1781.97 -97.56,1781.97 -7.56,1781.97 82.44,1781.97 172.44,1781.97 262.44,1781.97 352.44,1781.97 442.44,1781.97 532.44,1781.97 622.44,1781.97 712.44,1781.97 802.44,1781.97 892.44,1781.97 982.44,1781.97 1072.44,1781.97 1162.44,1781.97 1252.44,1781.97 1342.44,1781.97 1432.44,1781.97 1522.44,1781.97 1612.44,1781.97 1702.44,1781.97 1792.44,1781.97 1882.44,1781.97 1972.44,1781.97 2062.44,1781.97 2152.44,1781.97 2242.44,1781.97 2332.44,1781.97 2422.44,1781.97 2512.44,1781.97 2602.44,1781.97 2692.44,1781.97 2782.44,1781.97 2872.44,1781.97 2962.44,1781.97 3052.44,1781.97 -502.56,1871.97 -412.56,1871.97 -322.56,1871.97 -232.56,1871.97 -142.56,1871.97 -52.56,1871.97 37.44,1871.97 127.44,1871.97 217.44,1871.97 307.44,1871.97 397.44,1871.97 487.44,1871.97 577.44,1871.97 667.44,1871.97 757.44,1871.97 847.44,1871.97 937.44,1871.97 1027.44,1871.97 1117.44,1871.97 1207.44,1871.97 1297.44,1871.97 1387.44,1871.97 1477.44,1871.97 1567.44,1871.97 1657.44,1871.97 1747.44,1871.97 1837.44,1871.97 1927.44,1871.97 2017.44,1871.97 2107.44,1871.97 2197.44,1871.97 2287.44,1871.97 2377.44,1871.97 2467.44,1871.97 2557.44,1871.97 2647.44,1871.97 2737.44,1871.97 2827.44,1871.97 2917.44,1871.97 3007.44,1871.97 3097.44,1871.97 -457.56,1961.97 -367.56,1961.97 -277.56,1961.97 -187.56,1961.97 -97.56,1961.97 -7.56,1961.97 82.44,1961.97 172.44,1961.97 262.44,1961.97 352.44,1961.97 442.44,1961.97 532.44,1961.97 622.44,1961.97 712.44,1961.97 802.44,1961.97 892.44,1961.97 982.44,1961.97 1072.44,1961.97 1162.44,1961.97 1252.44,1961.97 1342.44,1961.97 1432.44,1961.97 1522.44,1961.97 1612.44,1961.97 1702.44,1961.97 1792.44,1961.97 1882.44,1961.97 1972.44,1961.97 2062.44,1961.97 2152.44,1961.97 2242.44,1961.97 2332.44,1961.97 2422.44,1961.97 2512.44,1961.97 2602.44,1961.97 2692.44,1961.97 2782.44,1961.97 2872.44,1961.97 2962.44,1961.97 3052.44,1961.97 -502.56,2051.97 -412.56,2051.97 -322.56,2051.97 -232.56,2051.97 -142.56,2051.97 -52.56,2051.97 37.44,2051.97 127.44,2051.97 217.44,2051.97 307.44,2051.97 397.44,2051.97 487.44,2051.97 577.44,2051.97 667.44,2051.97 757.44,2051.97 847.44,2051.97 937.44,2051.97 1027.44,2051.97 1117.44,2051.97 1207.44,2051.97 1297.44,2051.97 1387.44,2051.97 1477.44,2051.97 1567.44,2051.97 1657.44,2051.97 1747.44,2051.97 1837.44,2051.97 1927.44,2051.97 2017.44,2051.97 2107.44,2051.97 2197.44,2051.97 2287.44,2051.97 2377.44,2051.97 2467.44,2051.97 2557.44,2051.97 2647.44,2051.97 2737.44,2051.97 2827.44,2051.97 2917.44,2051.97 3007.44,2051.97 3097.44,2051.97 -457.56,2141.97 -97.56,2141.97 -7.56,2141.97 82.44,2141.97 172.44,2141.97 262.44,2141.97 352.44,2141.97 442.44,2141.97 532.44,2141.97 622.44,2141.97 712.44,2141.97 802.44,2141.97 892.44,2141.97 982.44,2141.97 1072.44,2141.97 1162.44,2141.97 1252.44,2141.97 1342.44,2141.97 1432.44,2141.97 1522.44,2141.97 1612.44,2141.97 1702.44,2141.97 1792.44,2141.97 1882.44,2141.97 1972.44,2141.97 2062.44,2141.97 2152.44,2141.97 2242.44,2141.97 2332.44,2141.97 2422.44,2141.97 2512.44,2141.97 2602.44,2141.97 2692.44,2141.97 2782.44,2141.97 3052.44,2141.97 -142.56,2231.97 -52.56,2231.97 37.44,2231.97 127.44,2231.97 217.44,2231.97 307.44,2231.97 397.44,2231.97 487.44,2231.97 577.44,2231.97 667.44,2231.97 757.44,2231.97 847.44,2231.97 937.44,2231.97 1027.44,2231.97 1117.44,2231.97 1207.44,2231.97 1297.44,2231.97 1387.44,2231.97 1477.44,2231.97 1567.44,2231.97 1657.44,2231.97 1747.44,2231.97 1837.44,2231.97 1927.44,2231.97 2017.44,2231.97 2107.44,2231.97 2197.44,2231.97 2287.44,2231.97 2377.44,2231.97 2467.44,2231.97 2557.44,2231.97 2647.44,2231.97 2737.44,2231.97
KEYA: C26.2 P2.5 R8.1 | length 1560.2
  Top Layer w10: v1(996.53,-852.47) 996.53,-572.94 P2.5 ; R8.1 1830.97,-1133.03 1839,-1125 v1(1839,-858)
  Top Layer w20: C26.2 R8.1
  Bottom Layer w10: v1(996.53,-852.47) 1638.47,-852.47 1644,-858 v1(1839,-858)
KEYB: C28.1 P2.6 R9.1 | length 1111.7
  Top Layer w10: v1(1046.07,-819.93) P2.6
  Top Layer w20: R9.1 C28.1 1802.44,-791.56 v1(1803,-791)
  Bottom Layer w10: v1(1046.07,-819.93) 1586.07,-819.93 1615,-791 v1(1803,-791)
KEYSW: D3.2 P2.7 R6.2 SW1.D | length 970.6
  Top Layer w10: D3.2 865.35,-1130 R6.2 ; SW1.D 1062.61,-1133.39 1098,-1098 1098,-571.47 P2.7
  Top Layer w20: R6.2 986.89,-1132.09 SW1.D
LEDK: FPC1.2 Q6.3 | length 159.6
  Bottom Layer w15: FPC1.2@1486.3,830.52 1564.38,830.52 1564.86,831 1640,831 Q6.3@1644,827
NetC1_2: C1.2 D1.2 R1.2 R3.2 S1.1 | length 349.7
  Top Layer w20: S1.1 300.51,-1123.96 358.44,-1066.03 R1.2 ; C1.2 R1.2 ; D1.2 R3.2 R1.2
NetC2_2: C2.2 D2.2 R2.2 R15.2 S2.1 | length 347.3
  Top Layer w20: R15.2 D2.2 2229.93,-1051.54 C2.2 R2.2 2259.39,-993.09 2306.51,-945.96 S2.1
NetLD1_2: LD1.2 R4.1 | length 62
  Top Layer w20: R4.1 LD1.2
NetLD2_2: LD2.2 R5.1 | length 62.5
  Top Layer w20: R5.1@2417.44,-810.09 LD2.2
NetLD3_2: LD3.2 R7.1 | length 61
  Top Layer w20: R7.1 LD3.2
NetQ1_1: Q1.1 R12.2 | length 56.4
  Top Layer w20: R12.2@2537.44,-849.03 R12.2 Q1.1
NetQ1_3: Q1.3 R4.2 | length 93.8
  Top Layer w20: Q1.3 Q1.3@2634.44,-751.03 ; Q1.3@2633.44,-750.03 Q1.3@2634.44,-751.03 ; R4.2 Q1.3@2634.44,-751.03
NetQ2_1: Q2.1 R13.2 | length 58.3
  Top Layer w20: R13.2 2228.07,-850.46 Q2.1@2285.44,-850.46
NetQ2_3: Q2.3 R5.2 | length 93.6
  Top Layer w20: Q2.3@2324.44,-751.66 2324.81,-752.03 Q2.3 R5.2@2417.44,-751.03
NetQ3_1: Q3.1 R14.2 | length 60.3
  Top Layer w20: R14.2@1918.81,-849.46 R14.2 1977.7,-849.09 Q3.1
NetQ3_3: Q3.3 R7.2 | length 94
  Top Layer w20: Q3.3 R7.2
NetQ6_1: Q6.1 R18.2 R19.1 | length 2743.3
  Top Layer w10: R18.2 530,-617.06 R19.1 528.94,452.94 689,613 v1(1097,613)
  Bottom Layer w10: v1(1097,613) 1740,613 1806,679 1806,850 1787.63,868.37 Q6.1
NetR8_2: R8.2 R11.1 SW1.A | length 184.4
  Top Layer w20: SW1.A 1743.03,-1133.39 R8.2 R11.1
NetR9_2: R9.2 R10.1 SW1.B | length 185.5
  Top Layer w20: SW1.B 1742.89,-936.54 R9.2 R10.1
RESX: FPC1.11 P2.17 | length 1676.1
  Top Layer w10: v1(1615,1010) 1646.07,978.93 P2.17
  Bottom Layer w10: FPC1.11 1610.29,1008 1612.29,1010 v1(1615,1010)
RUN: P2.10 R14.1 | length 1084.1
  Top Layer w10: v1@1207,-895.98 1207,-662.47 P2.10 ; v1(1881,-790) R14.1
  Bottom Layer w10: v1(1208,-896) 1208.72,-896.72 1843.28,-896.72 1881,-859 v1(1881,-790)
SCL: FPC1.9 P2.3 | length 1937.3
  Bottom Layer w10: 1037,898 1107.63,968.63 FPC1.9
  Bottom Layer w15: P2.3 946.07,807.07 1037,898
SDA: FPC1.10 P2.2 | length 2274.7
  Bottom Layer w10: P2.2 789,-566.33 789,890 887.32,988.32 FPC1.10
SW1: P2.8 R3.1 | length 1368.8
  Top Layer w10: R3.1 461.44,-1192.44 511,-1242 1108,-1242 1146.07,-1203.93 P2.8
SW2: P2.9 R15.1 | length 1491
  Top Layer w10: v1(1174,-979) 1174,-670 1187,-657 1187,-654.19 1196,-645.19 1196,-573.47 P2.9 ; v1(2113,-932) 2114.49,-933.49 R15.1
  Bottom Layer w10: v1(1174,-979) 2066,-979 v1(2113,-932)
TE: FPC1.6 P2.18 | length 1644.6
  Top Layer w10: v1@1569,908 1599,878 1599,-576.33 P2.18
  Bottom Layer w10: FPC1.6 1566.42,909.58 v1(1567,909)
VCC_5V: LD1.1 LD2.1 LD3.1 P2.13 P2.14 | length 1651
  Top Layer w30: LD3.1 v2(2172.44,-698.03) ; LD2.1 v2(2479.94,-698.03)
  Top Layer w40: LD1.1 v2(2787.44,-698.03)
  Bottom Layer w40: P2.13 P2.14 1450.47,-627.8 1450.47,-661.5 1487,-698.03 v2(2172.44,-698.03) v2(2479.94,-698.03) v2(2787.44,-698.03)
WARN: P2.11 R13.1 | length 1497.1
  Top Layer w10: P2.11 v1(1346.07,-347.93) ; v1(2220.93,-347.93) 2220.93,-785.52 R13.1
  Bottom Layer w10: v1(1346.07,-347.93) v1(2220.93,-347.93)
pads on no net: S1.3 S1.4 S2.3 S2.4 SW1.A3 SW1.A4

## Polygon pours and split planes (outlines as drawn)
GND on Bottom Layer "GND_L02_P001" (solid, remove dead copper, pour order 1): -1083,2594 -1027,2650 3737,2650 3737,-1347 3426,-1658 -799,-1658 -799,2588 -866,2655
GND on Top Layer "GND_L01_P002" (solid, remove dead copper, pour order 2): -1090.86,2589.99 -1034.86,2645.99 3729.14,2645.99 3729.14,-1351.01 3418.14,-1662.01 -806.86,-1662.01 -806.86,2583.99 -873.86,2650.99

## Keep-outs
Keep-Out Layer:
  circle w6: c-300.14,-1332.99 r98.43
  circle w6: c2906.44,-1332.99 r98.43
  circle w6: c2906.44,2198.35 r98.43
  circle w6: c-300.14,2198.35 r98.43
  lines w5: 0,338.58 0,1519.69
  lines w5.98: -567.09,1519.69 0,1519.69 ; -567.09,1521.86 -567.09,2145.12 ; -566.93,-1279.92 -566.93,338.58
  lines w6: -567.09,338.58 0,338.58 ; -566.93,2145.76 -567.09,2145.12 ; -566.77,-1280.08 cw(c-566.77,-1437.56) -409.29,-1437.56 -409.29,-1437.4 3015.91,-1437.4 3015.91,-1437.24 cw(c3173.39,-1437.24) 3173.39,-1279.76 3173.07,-1279.76 3173.07,2145.43 cw(c3173.07,2302.91) 3015.59,2302.91 3015.75,2302.76 -409.93,2302.76 -409.61,2302.6 ; -567.09,2145.12 ccw(c-567.09,2302.6) -409.61,2302.6 ; -567.09,2145.12 ccw(c-567.09,2302.6) -409.61,2302.6

## Silkscreen, mask and mechanical layers (free items; w line width, h text height)
Top Overlay:
  lines w5: 0,929.13 1574.8,929.13 ; 0,0 0,1858.27 2606.3,1858.27 2606.3,0 0,0
  text "Flow_Pump_LCD_V2.0" at -287,-246 h100
Mechanical 1:
  lines w5: 0,338.58 0,1519.69
  lines w5.98: -567.09,1519.69 0,1519.69 ; -567.09,1521.86 -567.09,2145.12 ; -566.93,-1279.92 -566.93,338.58
  lines w6: -567.09,338.58 0,338.58 ; -567.09,2145.12 ccw(c-567.09,2302.6) -409.61,2302.6 ; -566.77,-1280.08 cw(c-566.77,-1437.56) -409.29,-1437.56 ; -409.93,2302.76 3015.75,2302.76 ; -409.29,-1437.4 3015.91,-1437.4 ; 3015.59,2302.91 ccw(c3173.07,2302.91) 3173.07,2145.43 3173.07,-1279.76 ; 3015.91,-1437.24 cw(c3173.39,-1437.24) 3173.39,-1279.76